# EAGLE board i2c_lcd (EAGLE 6.3)
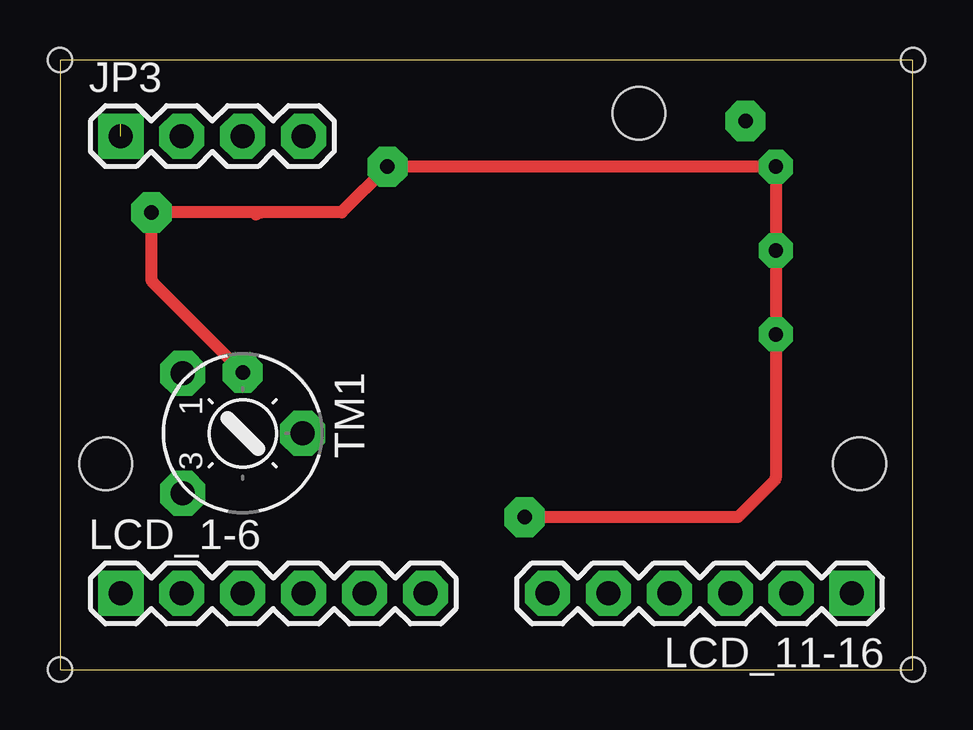
[diagram p0: board, top side]
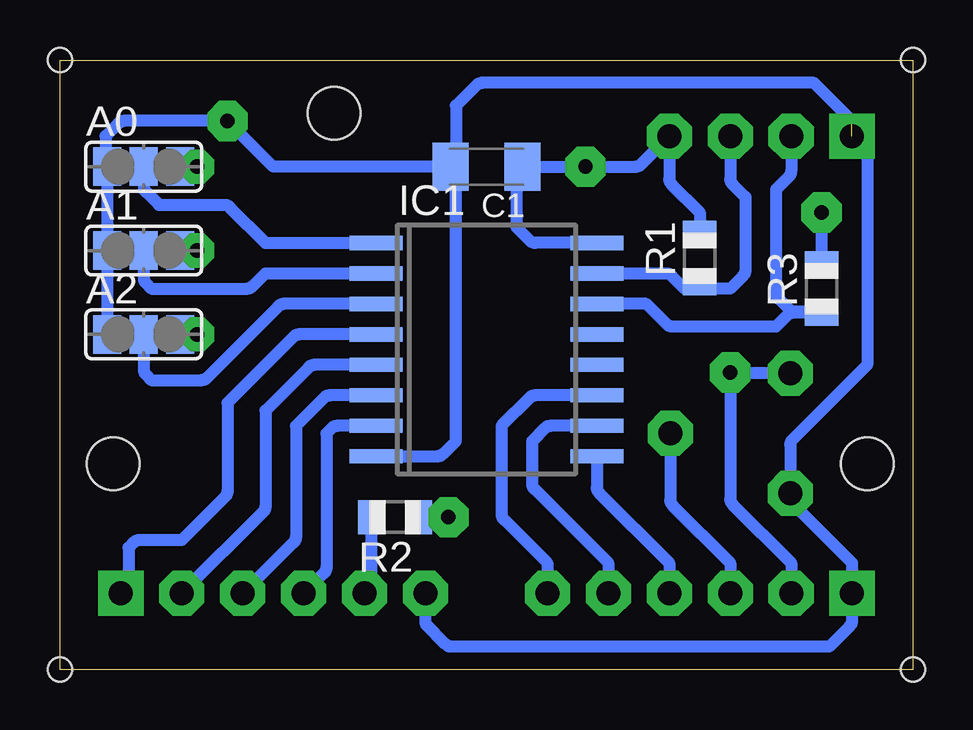
[diagram p1: board, bottom side, seen from below]

Size 35.56 x 25.4 mm. Coordinates in mm from the lower left corner, seen from the top.
Outline: 0,0 35.56,0 35.56,25.4 0,25.4 0,0
Copper layers (1*16): Top 0.035mm / dielectric 1.5mm / Bottom 0.035mm
Design rules "default *": minimum track width 10mil, minimum drill 24mil, track to track 12mil, track to pad 12mil, pad to pad 12mil, via to via 12mil, smd to smd 12mil, copper to edge 40mil, drill to drill 8mil, minimum pad ring 10mil, minimum via ring 8mil, stop-mask expansion 4mil, vias tented up to drill 0mil, thermal gap 10mil
Holes 2.2 mm at 33.34,8.57 24.13,23.18 1.91,8.57
Holes 1 mm at 0,0 0,25.4 35.56,25.4 35.56,0

## Footprints (pad centres in the part's own frame; a part is rotated, then mirrored left to right if it is on the bottom)
SJ_2 = smd 1.168 x 1.6: 1 -1.524,0; 2 0,0; 3 1.524,0
C1206K = smd 1.5 x 2: 1 -1.5,0; 2 1.5,0
SO16W = smd 0.6 x 2.2: 1 -4.445,-4.6; 2 -3.175,-4.6; 3 -1.905,-4.6; 4 -0.635,-4.6; 5 0.635,-4.6; 6 1.905,-4.6; 7 3.175,-4.6; 8 4.445,-4.6; 9 4.445,4.6; 10 3.175,4.6; 11 1.905,4.6; 12 0.635,4.6; 13 -0.635,4.6; 14 -1.905,4.6; 15 -3.175,4.6; 16 -4.445,4.6
1X04 = drill 1 pad 1.88 square: 1 0,0 | drill 1 pad 1.88 octagon: 2 2.54,0; 3 5.08,0; 4 7.62,0
1X06 = drill 1 pad 1.88 square: 1 0,0 | drill 1 pad 1.88 octagon: 2 2.54,0; 3 5.08,0; 4 7.62,0; 5 10.16,0; 6 12.7,0
R0805 = smd 1.1 x 1.4: 1 -1,0; 2 1,0
6MM = drill 1 pad 1.88 octagon: A -2.5,-2.5; E 2.5,-2.5; S 0,2.5

## Placement (x,y rotation side)
A0  [SJ_2]  32.07,20.95 0 bottom
A1  [SJ_2]  32.07,17.46 0 bottom
A2  [SJ_2]  32.07,13.97 0 bottom
C1  0.1uF  [C1206K]  17.78,20.95 180 bottom
IC1  PCF8574T  [SO16W]  17.78,13.34 270 bottom
JP3  [1X04]  2.54,22.23 0 top
LCD_1-6  [1X06]  2.54,3.17 0 top
LCD_11-16  [1X06]  33.02,3.17 180 top
R1  10k  [R0805]  8.89,17.14 90 bottom
R2  100  [R0805]  21.59,6.35 180 bottom
R3  10k  [R0805]  3.81,15.88 90 bottom
TM1  1K  [6MM]  7.62,9.84 270 top

## Library data of the parts
A0 A1 A2 = SparkFun
C1 R1-R3 TM1 = adafruit
IC1 = micro-philips; MPN: PCF8574T/3,512; OC_FARNELL: 1201255; OC_NEWARK: 70R6870
JP3 LCD_1-6 LCD_11-16 = SparkFun-Connectors

## Nets
A0: A0.2 IC1.1
A1: A1.2 IC1.2
A2: A2.2 IC1.3
ANODE: LCD_11-16.5 R2.2
CONTR: LCD_1-6.3 TM1.S
DB4: IC1.4 LCD_11-16.1
DB5: IC1.5 LCD_11-16.2
DB6: IC1.6 LCD_11-16.3
DB7: IC1.7 LCD_11-16.4
ENABLE: IC1.11 LCD_1-6.6
GND: A0.1 A1.1 A2.1 C1.2 IC1.8 JP3.1 LCD_1-6.1 LCD_11-16.6 TM1.E
RS: IC1.9 LCD_1-6.4
RW: IC1.10 LCD_1-6.5
SCL: IC1.14 JP3.2 R3.1
SDA: IC1.15 JP3.3 R1.1
VCC: A0.3 A1.3 A2.3 C1.1 IC1.16 JP3.4 LCD_1-6.2 R1.2 R2.1 R3.2 TM1.A

## Tracks (layer width: path | path; a pad name or v marks a point on that pad's centre or on a via)
A0
  Bottom 0.508: A0.2 32.07,20.13 arc-45 31.98,19.91 31.43,19.37 28.71,19.37 arc45 28.48,19.27 26.99,17.78 IC1.1
A1
  Bottom 0.508: A1.2 32.07,16.32 arc-45 31.98,16.1 31.75,15.88 27.75,15.88 arc-45 27.53,15.97 26.99,16.51 IC1.2
A2
  Bottom 0.508: IC1.3 26.22,15.24 arc-45 26.45,15.15 29.43,12.16 arc45 29.66,12.06 31.75,12.06 31.98,12.29 arc45 32.07,12.51 A2.2
ANODE
  Bottom 0.508: R2.2 22.59,3.58 arc45 22.68,3.35 LCD_11-16.5
CONTR
  Bottom 0.508: TM1.S 10.12,7.08 arc-45 10.03,6.85 7.62,4.45 LCD_1-6.3
DB4
  Bottom 0.508: IC1.4 25.59,13.97 arc-45 25.81,13.88 28.57,11.11 28.57,7.43 arc45 28.67,7.21 30.48,5.4 32.25,5.4 arc-45 32.48,5.3 32.7,5.08 32.7,3.62 arc45 32.8,3.4 LCD_11-16.1
DB5
  Bottom 0.508: IC1.5 24.95,12.7 arc-45 25.18,12.61 26.99,10.79 26.99,6.8 arc45 27.08,6.58 LCD_11-16.2
DB6
  Bottom 0.508: IC1.6 24.32,11.43 arc-45 24.54,11.34 25.72,10.16 25.72,5.53 arc45 25.81,5.3 LCD_11-16.3
DB7
  Bottom 0.508: IC1.7 24,10.16 arc-45 24.22,10.07 24.45,9.84 24.45,4.26 arc45 24.54,4.04 LCD_11-16.4
ENABLE
  Bottom 0.508: IC1.11 15.74,11.43 arc-45 15.97,11.34 17.14,10.16 17.14,6.48 arc-45 17.05,6.26 15.24,4.45 LCD_1-6.6
GND  (via drill 0.6 pad 1.68)  (1 unrouted)
  Bottom 0.406: 28.71,22.86 v28.57,22.86
  Bottom 0.508: IC1.8 19.82,8.89 arc-45 19.59,8.98 19.05,9.53 19.05,20.59 arc-45 19.14,20.82 C1.2 | A2.1 A1.1 A0.1 arc45 33.66,21.11 33.66,22.23 33.11,22.77 arc45 32.89,22.86 28.71,22.86 arc45 28.48,22.77 26.67,20.95 C1.2 | 2.54,22.73 arc-45 2.63,22.95 4.13,24.45 17.97,24.45 arc-45 18.19,24.36 19.05,23.5 19.05,21.32 arc45 19.14,21.09 C1.2 | LCD_11-16.6 20.32,1.91 19.46,1.04 arc-45 19.24,0.95 3.49,0.95 2.63,1.81 arc-45 2.54,2.04 LCD_1-6.1 2.54,4.45 5.03,6.93 arc45 5.12,7.16 TM1.E 5.12,9.35 arc45 5.03,9.58 1.91,12.7 1.91,21.46 arc-45 2,21.68 JP3.1
RS
  Bottom 0.508: IC1.9 13.18,7.6 arc-45 13.09,7.37 10.16,4.45 LCD_1-6.4
RW
  Bottom 0.508: IC1.10 15.11,10.16 arc-45 15.33,10.07 15.88,9.53 15.88,7.75 arc-45 15.78,7.53 12.7,4.45 LCD_1-6.5
SCL
  Bottom 0.508: JP3.2 5.08,20.77 arc45 5.17,20.55 5.71,20 5.71,15.69 arc-45 5.62,15.46 5.08,14.92 3.92,14.92 arc45 R3.1 5,14.88 arc-45 5.22,14.78 5.71,14.29 10.03,14.29 arc45 10.25,14.38 11.11,15.24 IC1.14
SDA
  Bottom 0.508: JP3.3 7.62,20.45 arc-45 7.53,20.23 6.99,19.68 6.99,16.64 arc45 7.08,16.42 7.62,15.88 8.49,15.88 arc45 8.71,15.97 R1.1 9.07,15.97 arc45 9.29,15.88 9.53,15.88 10.07,16.42 arc-45 10.29,16.51 IC1.15
VCC  (via drill 0.6 pad 1.42, 0.6 pad 1.68)
  Top 0.508: 8.39,19.05 v3.81,19.05 3.81,16.32 arc45 3.9,16.1 v7.62,12.38 | 8.39,19.05 11.75,19.05 v13.65,20.95 v29.84,20.95 v29.84,17.46 v29.84,13.97 29.84,8.07 arc-45 29.75,7.84 28.26,6.35 v19.37,6.35 | 8.39,19.05 arc45 8.16,18.96
  Bottom 0.508: R1.2 8.89,19.05 10.07,20.23 arc45 10.16,20.45 JP3.4 11.34,21.05 arc45 11.56,20.95 v13.65,20.95 C1.1 16.42,20.82 arc-45 16.51,20.59 16.51,18.41 15.97,17.87 arc-45 15.74,17.78 IC1.16 | A1.3 v29.84,17.46 | A2.3 v29.84,13.97 | v29.84,20.95 A0.3 | R3.2 v3.81,19.05 | v19.37,6.35 R2.1 | TM1.A 7.52,12.34 arc45 v7.62,12.38 7.39,12.16 arc-45 7.62,12.06 7.62,7.12 arc-45 7.53,6.89 5.08,4.45 LCD_1-6.2